# EAGLE board devboardjtag2 (EAGLE 5.07)
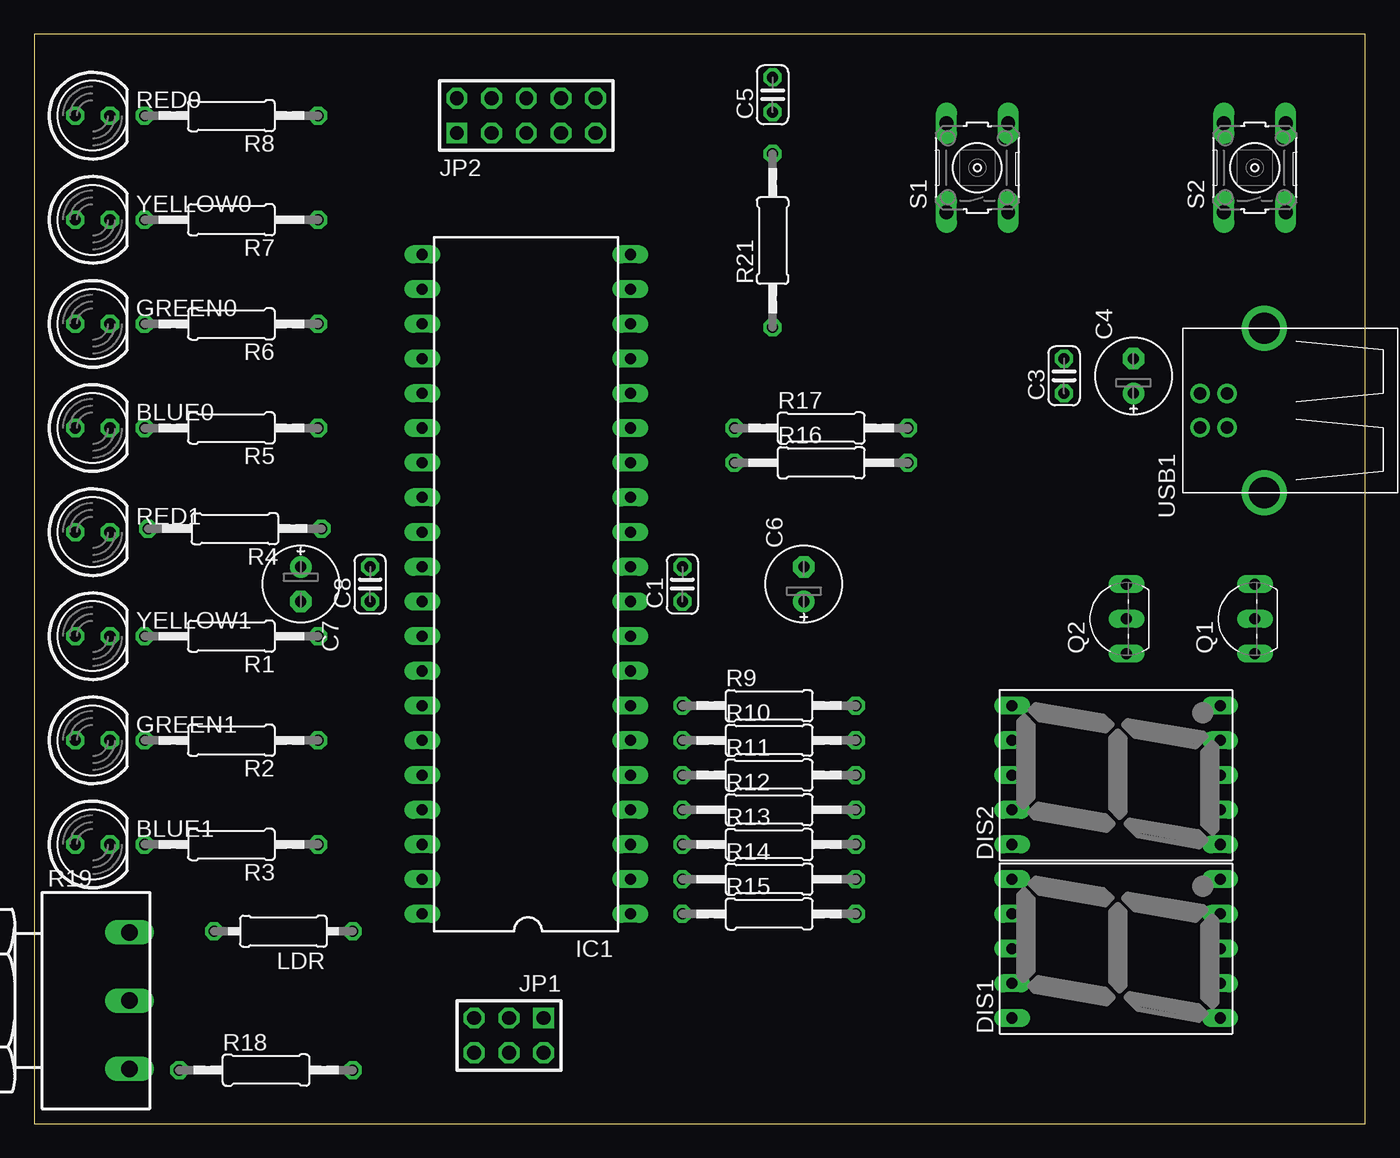
[diagram p0: board, top side]
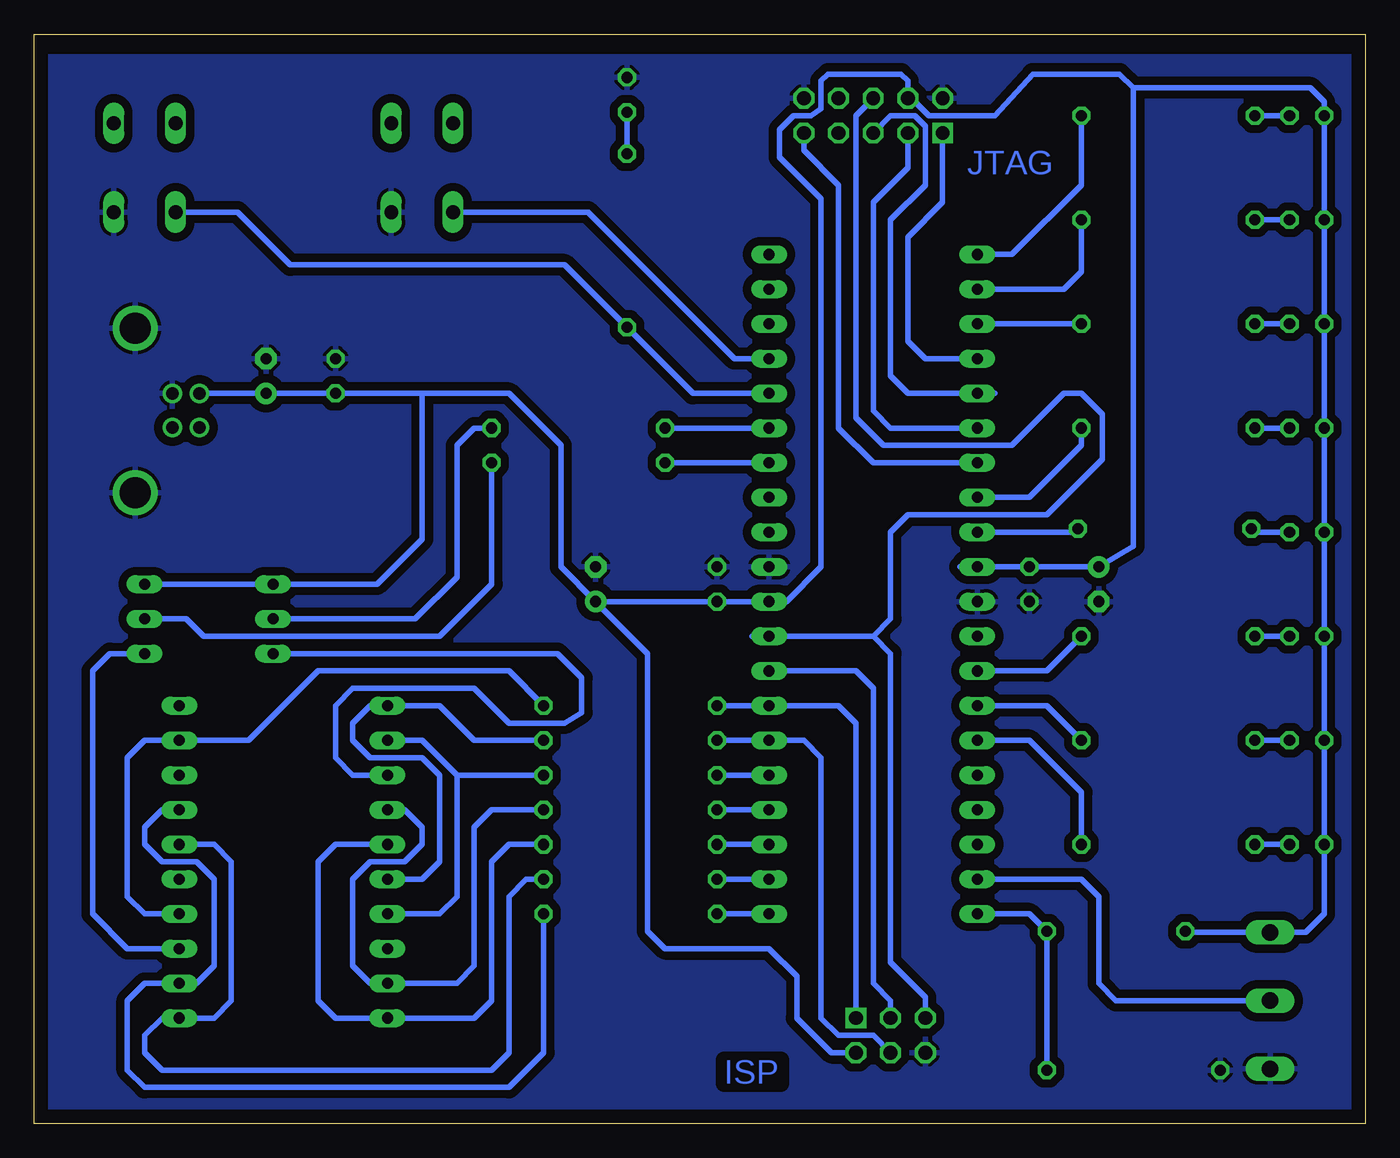
[diagram p1: board, bottom side, seen from below]

Size 97.46 x 79.75 mm. Coordinates in mm from the lower left corner, seen from the top.
Outline: 0,0 97.46,0 97.46,79.75 0,79.75 0,0
Copper layers (1*16): Top 0.035mm / dielectric 1.5mm / Bottom 0.035mm
Design rules "default": minimum track width 10mil, minimum drill 24mil, track to track 8mil, track to pad 8mil, pad to pad 8mil, via to via 8mil, smd to smd 8mil, copper to edge 40mil, drill to drill 8mil, minimum pad ring 10mil, minimum via ring 8mil, stop-mask expansion 4mil, vias tented up to drill 0mil, thermal gap 10mil

## Footprints (pad centres in the part's own frame; a part is rotated, then mirrored left to right if it is on the bottom)
LED5MM = drill 0.813 octagon: A -1.27,0; K 1.27,0
C025-024X044 = drill 0.813 octagon: 1 -1.27,0; 2 1.27,0
E2,5-6E = drill 0.813 pad 1.575 round: + -1.27,0 | drill 0.813 pad 1.575 octagon: - 1.27,0
HDSP-M = drill 0.813 long: 1 -5.08,-7.62; 2 -2.54,-7.62; 3 0,-7.62; 4 2.54,-7.62; 5 5.08,-7.62; 6 5.08,7.62; 7 2.54,7.62; 8 0,7.62; 9 -2.54,7.62; 10 -5.08,7.62
DIL40 = drill 0.813 long: 1 -24.13,-7.62; 2 -21.59,-7.62; 3 -19.05,-7.62; 4 -16.51,-7.62; 5 -13.97,-7.62; 6 -11.43,-7.62; 7 -8.89,-7.62; 8 -6.35,-7.62; 9 -3.81,-7.62; 10 -1.27,-7.62; 11 1.27,-7.62; 12 3.81,-7.62; 13 6.35,-7.62; 14 8.89,-7.62; 15 11.43,-7.62; 16 13.97,-7.62; 17 16.51,-7.62; 18 19.05,-7.62; 19 21.59,-7.62; 20 24.13,-7.62; 21 24.13,7.62; 22 21.59,7.62; 23 19.05,7.62; 24 16.51,7.62; 25 13.97,7.62; 26 11.43,7.62; 27 8.89,7.62; 28 6.35,7.62; 29 3.81,7.62; 30 1.27,7.62; 31 -1.27,7.62; 32 -3.81,7.62; 33 -6.35,7.62; 34 -8.89,7.62; 35 -11.43,7.62; 36 -13.97,7.62; 37 -16.51,7.62; 38 -19.05,7.62; 39 -21.59,7.62; 40 -24.13,7.62
AVR-ISP-6 = drill 1.016 square: 1 -2.54,-1.27 | drill 1.016 octagon: 2 -2.54,1.27; 3 0,-1.27; 4 0,1.27; 5 2.54,-1.27; 6 2.54,1.27
AVR-JTAG-10 = drill 1.016 square: 1 -5.08,-1.27 | drill 1.016 octagon: 2 -5.08,1.27; 3 -2.54,-1.27; 4 -2.54,1.27; 5 0,-1.27; 6 0,1.27; 7 2.54,-1.27; 8 2.54,1.27; 9 5.08,-1.27; 10 5.08,1.27
0207/10 = drill 0.813 octagon: 1 -5.08,0; 2 5.08,0
TO92-EBC = drill 0.813 long: B 0,-1.27; C -2.54,-1.27; E 2.54,-1.27
0207/12 = drill 0.813 octagon: 1 -6.35,0; 2 6.35,0
PC16S = drill 1.2 long: 1A -5,6.5; 1E 5,6.5; 1S 0,6.5
B3F-10XX = drill 1.016 long: 1 -3.251,2.261; 2 3.251,2.261; 3 -3.251,-2.261; 4 3.251,-2.261
USB-B-H = drill 0.914 round: D+ 0,1.25; D- 1.981,1.25; GND 0,-1.25; VBUS 1.981,-1.25 | drill 2.286 round: GND@1 -2.718,6.02; GND@2 -2.718,-6.02

## Placement (x,y rotation side)
BLUE0  [LED5MM]  4.28,50.92 0 top
BLUE1  [LED5MM]  4.28,20.44 0 top
C1  100N  [C025-024X044]  47.46,39.49 90 top
C3  100N  [C025-024X044]  75.4,54.73 90 top
C4  10u  [E2,5-6E]  80.48,54.73 90 top
C5  100N  [C025-024X044]  54.06,75.31 90 top
C6  10u  [E2,5-6E]  56.35,39.49 90 top
C7  10u  [E2,5-6E]  19.52,39.49 270 top
C8  100N  [C025-024X044]  24.6,39.49 90 top
DIS1  HD-H101  [HDSP-M]  79.21,12.82 90 top
DIS2  HD-H101  [HDSP-M]  79.21,25.52 90 top
GREEN0  [LED5MM]  4.28,58.54 0 top
GREEN1  [LED5MM]  4.28,28.06 0 top
IC1  MEGA32-P  [DIL40]  36.03,39.49 90 top
JP1  AVR-ISP-6  [AVR-ISP-6]  34.76,6.47 180 top
JP2  AVR-JTAG-10  [AVR-JTAG-10]  36.03,73.78 0 top
LDR  [0207/10]  18.25,14.09 180 top
Q1  BC557  [TO92-EBC]  88.1,36.95 90 top
Q2  BC557  [TO92-EBC]  78.7,36.95 90 top
R1  330  [0207/12]  14.44,35.68 180 top
R2  330  [0207/12]  14.44,28.06 180 top
R3  330  [0207/12]  14.44,20.44 180 top
R4  330  [0207/12]  14.69,43.56 180 top
R5  330  [0207/12]  14.44,50.92 180 top
R6  330  [0207/12]  14.44,58.54 180 top
R7  330  [0207/12]  14.44,66.16 180 top
R8  330  [0207/12]  14.44,73.78 180 top
R9  330  [0207/12]  53.81,30.6 0 top
R10  330  [0207/12]  53.81,28.06 0 top
R11  330  [0207/12]  53.81,25.52 0 top
R12  330  [0207/12]  53.81,22.98 0 top
R13  330  [0207/12]  53.81,20.44 0 top
R14  330  [0207/12]  53.81,17.9 0 top
R15  330  [0207/12]  53.81,15.36 0 top
R16  1k  [0207/12]  57.62,48.38 0 top
R17  1k  [0207/12]  57.62,50.92 0 top
R18  49,9k  [0207/12]  16.98,3.93 0 top
R19  PC16S  [PC16S]  0.47,9.01 270 top
R21  1k  [0207/12]  54.06,64.64 90 top
RED0  [LED5MM]  4.28,73.78 0 top
RED1  [LED5MM]  4.28,43.3 0 top
S1  [B3F-10XX]  69.05,69.97 90 top
S2  [B3F-10XX]  89.37,69.97 90 top
USB1  USB-B-H  [USB-B-H]  87.34,52.21 180 top
YELLOW0  [LED5MM]  4.28,66.16 0 top
YELLOW1  [LED5MM]  4.28,35.68 0 top

## Library data of the parts
BLUE0 BLUE1 GREEN0 GREEN1 RED0 RED1 YELLOW0 YELLOW1 = led
C1 C3-C8 LDR R1-R18 R21 = rcl
DIS1 DIS2 = display-hp
IC1 = atmel
JP1 JP2 = avr-4
Q1 Q2 = transistor-pnp
R19 = piher
S1 S2 = switch-omron
USB1 = con-usb-2

## Nets
AREF: IC1.32
GND: C1.2 C3.2 C4.- C5.2 C6.- C7.- C8.1 IC1.11 IC1.31 JP1.6 JP2.2 JP2.10 R18.1 R19.1E S1.3 S2.3 USB1.GND USB1.GND@1 USB1.GND@2
N$1: IC1.40 LDR.1 R18.2
N$2: R1.2 YELLOW1.K
N$3: GREEN1.K R2.2
N$4: BLUE1.K R3.2
N$5: R4.2 RED1.K
N$6: BLUE0.K R5.2
N$7: GREEN0.K R6.2
N$8: R7.2 YELLOW0.K
N$9: R8.2 RED0.K
N$10: IC1.7 JP1.1 R9.1
N$11: IC1.6 JP1.4 R10.1
N$12: IC1.5 R11.1
N$13: IC1.4 R12.1
N$14: IC1.3 R13.1
N$15: IC1.2 R14.1
N$16: IC1.1 R15.1
N$17: IC1.33 R1.1
N$18: IC1.34 R2.1
N$19: IC1.35 R3.1
N$20: IC1.29 R4.1
N$21: IC1.28 R5.1
N$22: IC1.27 JP2.9
N$23: IC1.26 JP2.3
N$24: IC1.25 JP2.5
N$25: DIS1.7 DIS2.7 R11.2
N$26: DIS1.6 DIS2.6 R10.2
N$27: DIS1.4 DIS2.4 R9.2
N$28: DIS1.2 DIS2.2 R15.2
N$29: DIS1.1 DIS2.1 R14.2
N$30: IC1.24 JP2.1
N$31: DIS1.10 DIS2.10 R13.2
N$32: DIS1.3 Q1.C
N$33: DIS2.8 Q2.C
N$34: IC1.14 R16.1
N$35: IC1.15 R17.1
N$36: Q1.B R16.2
N$37: Q2.B R17.2
N$38: IC1.21 R8.1
N$39: IC1.17 S1.1
N$40: IC1.39 R19.1S
N$41: DIS1.9 DIS2.9 R12.2
N$42: IC1.8 JP1.3
N$43: C5.1 R21.2
N$44: IC1.9 JP1.5 JP2.6
N$45: IC1.16 R21.1 S2.1
N$46: IC1.22 R7.1
N$47: IC1.23 R6.1
VCC: BLUE0.A BLUE1.A C1.1 C3.1 C4.+ C6.+ C7.+ C8.2 GREEN0.A GREEN1.A IC1.10 IC1.30 JP1.2 JP2.4 LDR.2 Q1.E Q2.E R19.1A RED0.A RED1.A USB1.VBUS YELLOW0.A YELLOW1.A

## Tracks (layer width: path | path; a pad name or v marks a point on that pad's centre or on a via)
GND
  pour Bottom (isolate 0.61): -1.05,78.1 97.75,78.1 96.74,0.88 -1.05,0.88
N$1
  Bottom 0.406: R18.2 LDR.1 24.6,15.36 IC1.40
N$2
  Bottom 0.406: YELLOW1.K R1.2
N$3
  Bottom 0.406: GREEN1.K R2.2
N$4
  Bottom 0.406: BLUE1.K R3.2
N$5
  Bottom 0.406: RED1.K 8.09,43.3 R4.2
N$6
  Bottom 0.406: BLUE0.K R5.2
N$7
  Bottom 0.406: GREEN0.K R6.2
N$8
  Bottom 0.406: YELLOW0.K R7.2
N$9
  Bottom 0.406: RED0.K R8.2
N$10
  Bottom 0.406: IC1.7 R9.1 | IC1.7 42.38,30.6 | JP1.1 37.3,29.33 38.57,30.6 IC1.7
N$11
  Bottom 0.406: R10.1 IC1.6 41.11,28.06 39.84,26.79 39.84,7.74 38.57,6.47 36.03,6.47 JP1.4
N$12
  Bottom 0.406: IC1.5 R11.1
N$13
  Bottom 0.406: IC1.4 R12.1
N$14
  Bottom 0.406: IC1.3 R13.1
N$15
  Bottom 0.406: IC1.2 R14.1
N$16
  Bottom 0.406: IC1.1 R15.1
N$17
  Bottom 0.406: IC1.33 23.33,33.14 R1.1
N$18
  Bottom 0.406: R2.1 23.33,30.6 IC1.34
N$19
  Bottom 0.406: IC1.35 24.6,28.06 20.79,24.25 R3.1
N$20
  Bottom 0.406: IC1.29 21.3,43.3 R4.1
N$21
  Bottom 0.406: IC1.28 24.6,45.84 20.79,49.65 R5.1
N$22
  Bottom 0.406: IC1.27 36.03,48.38 38.57,50.92 38.57,68.7 41.11,71.24 JP2.9
N$23
  Bottom 0.406: JP2.3 33.49,69.97 36.03,67.43 36.03,52.19 34.76,50.92 IC1.26
N$24
  Bottom 0.406: 33.49,53.46 IC1.25 27.14,53.46 33.49,53.46 | 33.49,53.46 34.76,54.73 34.76,66.16 32.22,68.7 32.22,73.02 32.98,73.78 34.76,73.78 JP2.5
N$25
  Bottom 0.406: DIS1.7 67.78,15.36 66.51,16.63 66.51,25.52 | DIS2.7 69.05,28.06 66.51,25.52 | 66.51,25.52 R11.2
N$26
  Bottom 0.406: DIS1.6 69.05,17.9 67.78,19.17 67.78,25.52 69.05,26.79 72.86,26.79 74.13,28.06 74.13,29.33 72.86,30.6 DIS2.6 67.78,30.6 65.24,28.06 R10.2
N$27
  Bottom 0.406: DIS1.4 89.37,15.36 90.64,16.63 90.64,26.79 89.37,28.06 DIS2.4 81.75,28.06 76.67,33.14 62.7,33.14 R9.2
N$28
  Bottom 0.406: DIS2.2 88.1,22.98 89.37,21.71 89.37,20.44 88.1,19.17 85.56,19.17 84.29,17.9 84.29,11.55 85.56,10.28 DIS1.2 89.37,10.28 90.64,9.01 90.64,3.93 89.37,2.66 62.7,2.66 60.16,5.2 R15.2
N$29
  Bottom 0.406: DIS2.1 84.29,20.44 83.02,19.17 83.02,9.01 84.29,7.74 DIS1.1 88.1,7.74 89.37,6.47 89.37,5.2 88.1,3.93 63.97,3.93 62.7,5.2 62.7,16.63 61.43,17.9 R14.2
N$30
  Bottom 0.406: JP2.1 30.95,67.43 33.49,64.89 33.49,57.27 32.22,56 IC1.24
N$31
  Bottom 0.406: DIS2.10 75.4,20.44 76.67,19.17 76.67,9.01 75.4,7.74 DIS1.10 65.24,7.74 63.97,9.01 63.97,19.17 62.7,20.44 R13.2
N$32
  Bottom 0.406: DIS1.3 90.64,12.82 93.18,15.36 93.18,33.14 91.91,34.41 Q1.C
N$33
  Bottom 0.406: DIS2.8 74.13,25.52 75.4,26.79 75.4,30.6 74.13,31.87 65.24,31.87 62.7,29.33 58.64,29.33 57.37,30.09 57.37,32.63 59.14,34.41 Q2.C
N$34
  Bottom 0.406: IC1.14 R16.1
N$35
  Bottom 0.406: IC1.15 R17.1
N$36
  Bottom 0.406: Q1.B 86.32,36.95 85.05,35.68 67.78,35.68 63.97,39.49 R16.2
N$37
  Bottom 0.406: R17.2 65.24,50.92 66.51,49.65 66.51,40 69.56,36.95 Q2.B
N$38
  Bottom 0.406: R8.1 20.79,68.7 25.87,63.62 IC1.21
N$39
  Bottom 0.406: 56.86,66.67 46.19,56 IC1.17 | 56.86,66.67 56.88,66.7 | S1.1 56.91,66.72 56.86,66.67
N$40
  Bottom 0.406: R19.1S 18.25,9.01 19.52,10.28 19.52,16.63 20.79,17.9 IC1.39
N$41
  Bottom 0.406: DIS2.9 70.32,22.98 69.05,21.71 69.05,20.44 70.32,19.17 72.86,19.17 74.13,17.9 74.13,11.55 72.86,10.28 DIS1.9 66.51,10.28 65.24,11.55 65.24,21.71 63.97,22.98 R12.2
N$42
  Bottom 0.406: IC1.8 37.3,33.14 36.03,31.87 36.03,10.28 34.76,9.01 JP1.3
N$43
  Bottom 0.406: R21.2 C5.1
N$44
  Bottom 0.406: 44.92,35.68 IC1.9 36.03,35.68 | 37.3,68.7 37.3,51.68 35.27,49.65 25.87,49.65 22.06,53.46 20.79,53.46 19.27,51.94 19.27,48.64 19.77,48.13 | 37.3,68.7 37.3,69.21 | 19.77,48.13 23.33,44.57 33.49,44.57 34.76,43.3 34.76,36.95 36.03,35.68 | 19.77,48.13 19.52,48.38 | 36.03,35.68 34.76,34.41 34.76,11.81 32.22,9.27 JP1.5 | JP2.6 37.3,73.78 37.3,68.7
N$45
  Bottom 0.406: S2.1 82.56,66.72 78.7,62.86 58.64,62.86 R21.1 49.24,53.46 IC1.16
N$46
  Bottom 0.406: IC1.22 22.06,61.08 20.79,62.35 R7.1
N$47
  Bottom 0.406: R6.1 IC1.23
VCC
  Bottom 0.406: Q1.E Q2.E 72.35,39.49 69.05,42.79 69.05,53.46 | LDR.2 13.09,14.01 R19.1A 4.36,14.01 3.01,15.36 BLUE1.A GREEN1.A YELLOW1.A RED1.A BLUE0.A GREEN0.A YELLOW0.A RED0.A 3.01,74.8 4.03,75.81 16.98,75.81 | 16.98,75.81 18,76.83 24.35,76.83 27.14,73.78 31.97,73.78 33.24,75.05 JP2.4 33.49,76.32 34,76.83 39.33,76.83 39.84,76.32 39.84,74.29 40.6,73.78 41.87,73.78 42.89,72.77 42.89,70.73 39.84,67.69 39.84,40.76 42.38,38.22 IC1.10 | 16.98,75.81 16.98,42.29 C7.+ C8.2 IC1.30 29.68,40.76 | C6.+ 52.54,34.41 52.54,14.09 51.27,12.82 43.65,12.82 41.62,10.79 41.62,7.74 39.08,5.2 JP1.2 | C6.+ 58.89,40.76 58.89,49.65 62.7,53.46 69.05,53.46 | IC1.10 43.14,38.22 | USB1.VBUS 85.31,53.46 C4.+ C3.1 69.05,53.46 | IC1.10 C1.1 | IC1.10 C6.+

## Text on the board
Bottom: JTAG | ISP